# Altium PCB mergedPCBs.PcbDoc (part 2 of 4)
Units mil, origin at the board's own origin, x right, y up, seen from the top; angles counter-clockwise.
Board outline 7880 x 8510 mil, 2 copper layers (Top Layer, Bottom Layer); 381 components, 0 nets, 1142 pads, 205 vias.
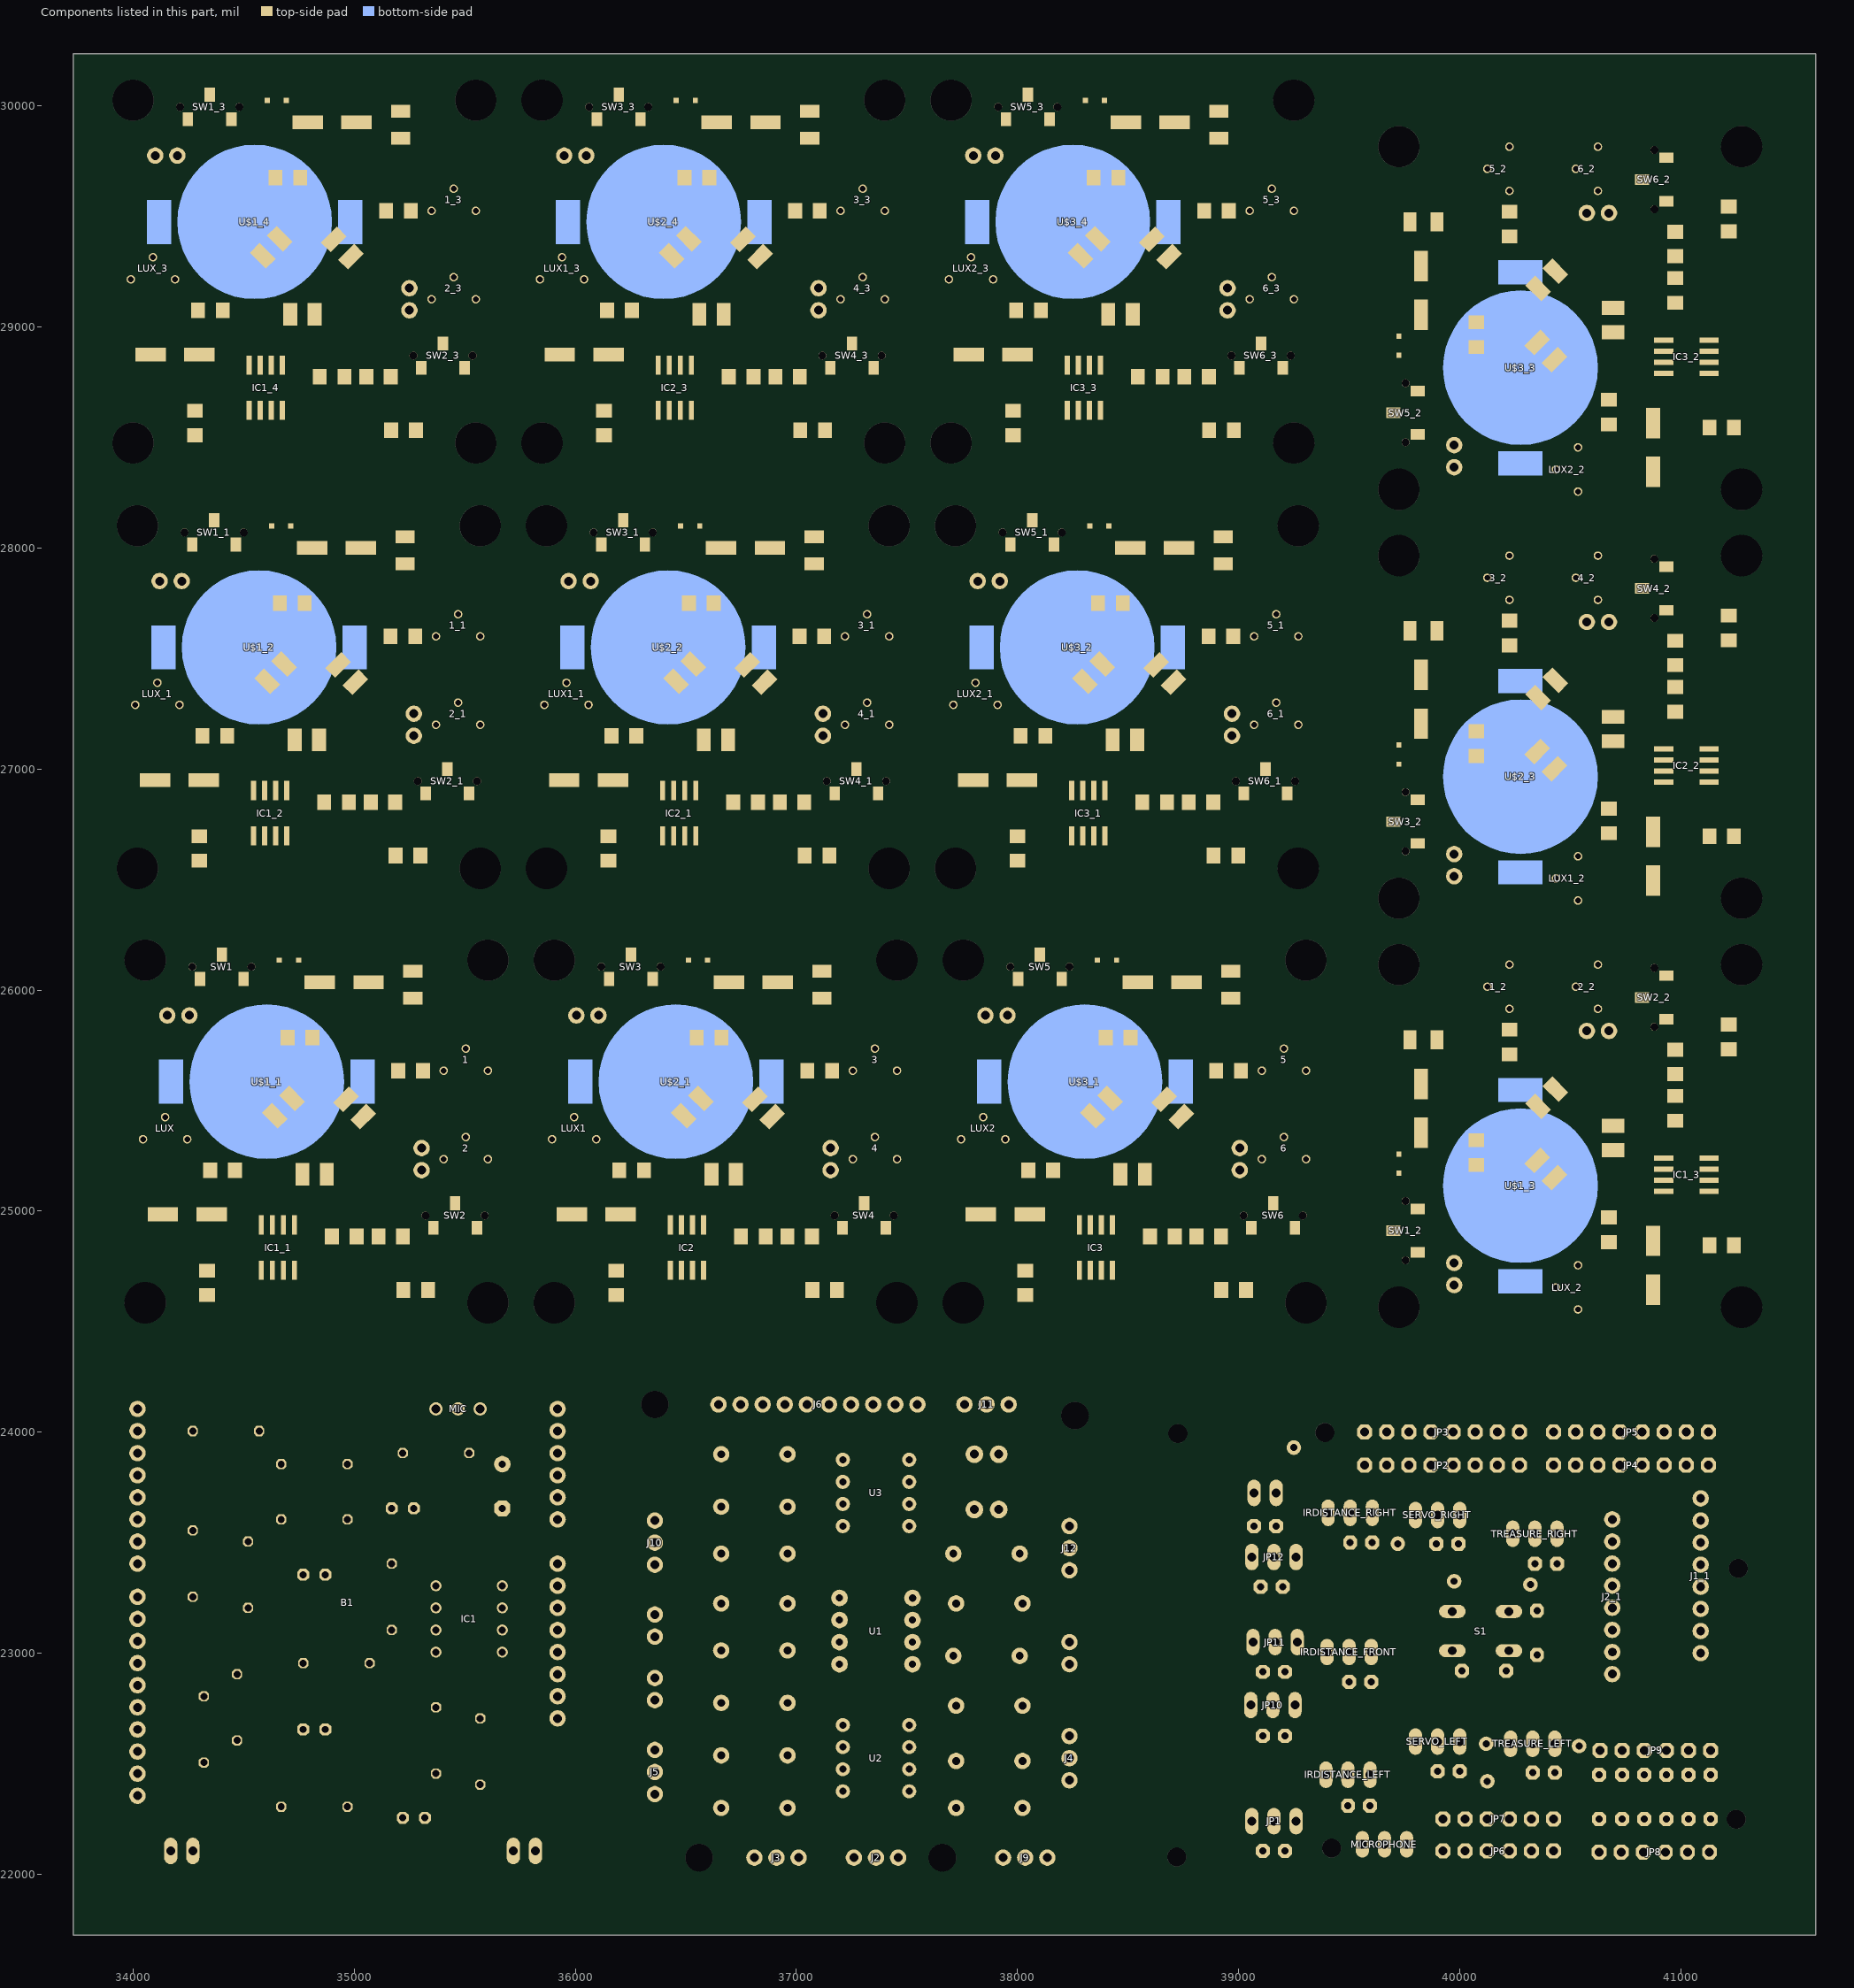
[diagram p2: the components of this part, seen from the top]

## Via types
v1: diameter 41.59/41.59 (per signal layer), hole 25.59, Top Layer to Bottom Layer, 168 vias
v2: diameter 34/34 (per signal layer), hole 20, Top Layer to Bottom Layer, 25 vias
v3: diameter 53.15/66 (per signal layer), hole 35.43, Top Layer to Bottom Layer, 12 vias

## Nets (pads, with @x,y where several pads share a name; then routed paths per layer and width w, separated by ;. In a path a pad name is that pad's centre, name@x,y a point inside that pad or via, vN(x,y) a via of type N, cw(c..) or ccw(c..) an arc to the next point about the centre after c; other vN are vias at no path point) (continued)
copper on no net: | length 406403
  Top Layer w6: 34294.02,29075 34300.24,29068.78 ; 34314.02,27150 34320.24,27143.78 ; 34349.02,25185 34355.24,25178.78 ; 34450,28968.86 34481.57,28968.86 34487.72,28975 ; 34470,27043.86 34501.57,27043.86 34507.72,27050 ; 34505,25078.86 34536.57,25078.86 34542.72,25085 ; 36144.02,29075 36150.24,29068.78 ; 36164.02,27150 36170.24,27143.78 ; 36199.02,25185 36205.24,25178.78 ; 36300,28968.86 36331.57,28968.86 36337.72,28975 ; 36320,27043.86 36351.57,27043.86 36357.72,27050 ; 36355,25078.86 36386.57,25078.86 36392.72,25085 ; 37994.02,29075 38000.24,29068.78 ; 38014.02,27150 38020.24,27143.78 ; 38049.02,25185 38055.24,25178.78 ; 38150,28968.86 38181.57,28968.86 38187.72,28975 ; 38170,27043.86 38201.57,27043.86 38207.72,27050 ; 38205,25078.86 38236.57,25078.86 38242.72,25085 ; 40675,24859.02 40681.22,24865.24 ; 40675,26709.02 40681.22,26715.24 ; 40675,28559.02 40681.22,28565.24 ; 40775,25052.72 40781.14,25046.57 40781.14,25015 ; 40775,26902.72 40781.14,26896.57 40781.14,26865 ; 40775,28752.72 40781.14,28746.57 40781.14,28715
  Top Layer w10: 35920,22705 36320,22705 ; 36125,21815 36125,22660 ; 36130,22755 36130,24365 ; 38325,23213 38425,23313 38425,23473.15 v3(38690.27,23738.42) ; 38500,23665 38500,24390 ; 38535,21770 38535,23510
  Top Layer w12: 40729.87,22100.22 40734.87,22105.22 ; 40829.87,22100.22 40834.87,22105.22 ; 40929.87,22100.22 40934.87,22105.22 40934.87,22110.22 ; 41029.87,22100.22 41034.87,22105.22 41034.87,22115.22 ; 41129.87,22100.22 41134.87,22105.22 41134.87,22115.22
  Top Layer w16: 34079.76,28875 34079.76,28895.24 ; 34099.76,26950 34099.76,26970.24 ; 34134.76,24985 34134.76,25005.24 ; 34300.24,28875 34300,28875 34350,28875 ; 34320.24,26950 34320,26950 34370,26950 ; 34355.24,24985 34355,24985 34405,24985 ; 34600,30025 34606.69,30025 ; 34606.69,30022.31 34606.69,30025 ; 34606.69,30031.69 34606.69,30025 ; 34620,28100 34626.69,28100 ; 34625,28827.36 34625.19,28846.55 34625.19,28828.47 ; 34626.69,28097.31 34626.69,28100 ; 34626.69,28106.69 34626.69,28100 ; 34644.02,29675 34650,29669.02 ; 34645,26902.36 34645.19,26921.55 34645.19,26903.47 ; 34655,26135 34661.69,26135 ; 34661.69,26132.31 34661.69,26135 ; 34661.69,26141.69 34661.69,26135 ; 34664.02,27750 34670,27744.02 ; 34680,24937.36 34680.19,24956.55 34680.19,24938.47 ; 34699.02,25785 34705,25779.02 ; v1(34736.2,28830) v1@34740.84,28827.36 ; 34750,29925 34789.76,29925 ; 34755.98,29675 34932.85,29675 34950,29657.85 ; v1(34756.2,26905) v1@34760.84,26902.36 ; 34770,28000 34809.76,28000 ; 34775.98,27750 34952.85,27750 34970,27732.85 ; v1(34791.2,24940) v1@34795.84,24937.36 ; 34805,26035 34844.76,26035 ; 34810.98,25785 34987.85,25785 35005,25767.85 ; 34844.02,28775 34850,28769.02 ; 34864.02,26850 34870,26844.02 ; 34899.02,24885 34905,24879.02 ; 34950,28780.98 34955.98,28775 ; 34970,26855.98 34975.98,26850 ; 34984.21,28897 34986,28897 ; 35000,29935.24 35010.24,29925 ; 35004.21,26972 35006,26972 ; 35005,24890.98 35010.98,24885 ; 35020,28010.24 35030.24,28000 ; 35039.21,25007 35041,25007 ; 35050,28770.12 35054.88,28775 ; 35055,26045.24 35065.24,26035 ; 35070,26845.12 35074.88,26850 ; 35105,24880.12 35109.88,24885 ; 35177.95,29852.95 35210.24,29852.95 ; 35197.95,27927.95 35230.24,27927.95 ; 35210.24,29975 35250,29975 ; 35230.24,28050 35270,28050 ; 35232.95,25962.95 35265.24,25962.95 ; 35265.24,26085 35305,26085 ; 35278.98,28533 35286.98,28525 35300,28525 ; 35298.98,26608 35306.98,26600 35320,26600 ; 35303.15,28814.76 35303.15,28828.15 ; 35323.15,26889.76 35323.15,26903.15 ; 35333.98,24643 35341.98,24635 35355,24635 ; 35358.15,24924.76 35358.15,24938.15 ; 35358.5,28583.5 35358.5,28583.61 ; 35378.5,26658.5 35378.5,26658.61 ; 35401.57,28776.57 35401.57,28796.75 ; 35413.5,24693.5 35413.5,24693.61 ; 35421.57,26851.57 35421.57,26871.75 ; 35456.57,24886.57 35456.57,24906.75 ; 35500,28814.76 35500,28825 ; 35520,26889.76 35520,26900 ; 35555,24924.76 35555,24935 ; 35600,28841.51 35601.15,28842.66 ; 35600,28898.25 35601.15,28897.1 ; 35620,26916.51 35621.15,26917.66 ; 35620,26973.25 35621.15,26972.1 ; 35655,24951.51 35656.15,24952.66 ; 35655,25008.25 35656.15,25007.1 ; 35929.76,28875 35929.76,28895.24 ; 35949.76,26950 35949.76,26970.24 ; 35984.76,24985 35984.76,25005.24 ; 36150.24,28875 36150,28875 36200,28875 ; 36170.24,26950 36170,26950 36220,26950 ; 36205.24,24985 36205,24985 36255,24985 ; 36450,30025 36456.69,30025 ; 36456.69,30022.31 36456.69,30025 ; 36456.69,30031.69 36456.69,30025 ; 36470,28100 36476.69,28100 ; 36475,28827.36 36475.19,28846.55 36475.19,28828.47 ; 36476.69,28097.31 36476.69,28100 ; 36476.69,28106.69 36476.69,28100 ; 36494.02,29675 36500,29669.02 ; 36495,26902.36 36495.19,26921.55 36495.19,26903.47 ; 36505,26135 36511.69,26135 ; 36511.69,26132.31 36511.69,26135 ; 36511.69,26141.69 36511.69,26135 ; 36514.02,27750 36520,27744.02 ; 36530,24937.36 36530.19,24956.55 36530.19,24938.47 ; 36549.02,25785 36555,25779.02 ; v1(36586.2,28830) v1@36590.84,28827.36 ; 36600,29925 36639.76,29925 ; 36605.98,29675 36782.85,29675 36800,29657.85 ; v1(36606.2,26905) v1@36610.84,26902.36 ; 36620,28000 36659.76,28000 ; 36625.98,27750 36802.85,27750 36820,27732.85 ; v1(36641.2,24940) v1@36645.84,24937.36 ; 36655,26035 36694.76,26035 ; 36660.98,25785 36837.85,25785 36855,25767.85 ; 36694.02,28775 36700,28769.02 ; 36714.02,26850 36720,26844.02 ; 36749.02,24885 36755,24879.02 ; 36800,28780.98 36805.98,28775 ; 36820,26855.98 36825.98,26850 ; 36834.21,28897 36836,28897 ; 36850,29935.24 36860.24,29925 ; 36854.21,26972 36856,26972 ; 36855,24890.98 36860.98,24885 ; 36870,28010.24 36880.24,28000 ; 36889.21,25007 36891,25007 ; 36900,28770.12 36904.88,28775 ; 36905,26045.24 36915.24,26035 ; 36920,26845.12 36924.88,26850 ; 36955,24880.12 36959.88,24885 ; 37027.95,29852.95 37060.24,29852.95 ; 37047.95,27927.95 37080.24,27927.95 ; 37060.24,29975 37100,29975 ; 37080.24,28050 37120,28050 ; 37082.95,25962.95 37115.24,25962.95 ; 37115.24,26085 37155,26085 ; 37128.98,28533 37136.98,28525 37150,28525 ; 37148.98,26608 37156.98,26600 37170,26600 ; 37153.15,28814.76 37153.15,28828.15 ; 37173.15,26889.76 37173.15,26903.15 ; 37183.98,24643 37191.98,24635 37205,24635 ; 37208.15,24924.76 37208.15,24938.15 ; 37208.5,28583.5 37208.5,28583.61 ; 37228.5,26658.5 37228.5,26658.61 ; 37251.57,28776.57 37251.57,28796.75 ; 37263.5,24693.5 37263.5,24693.61 ; 37271.57,26851.57 37271.57,26871.75 ; 37306.57,24886.57 37306.57,24906.75 ; 37350,28814.76 37350,28825 ; 37370,26889.76 37370,26900 ; 37405,24924.76 37405,24935 ; 37450,28841.51 37451.15,28842.66 ; 37450,28898.25 37451.15,28897.1 ; 37470,26916.51 37471.15,26917.66 ; 37470,26973.25 37471.15,26972.1 ; 37505,24951.51 37506.15,24952.66 ; 37505,25008.25 37506.15,25007.1 ; 37779.76,28875 37779.76,28895.24 ; 37799.76,26950 37799.76,26970.24 ; 37834.76,24985 37834.76,25005.24 ; 38000.24,28875 38000,28875 38050,28875 ; 38020.24,26950 38020,26950 38070,26950 ; 38055.24,24985 38055,24985 38105,24985 ; 38300,30025 38306.69,30025 ; 38306.69,30022.31 38306.69,30025 ; 38306.69,30031.69 38306.69,30025 ; 38320,28100 38326.69,28100 ; 38325,28827.36 38325.19,28846.55 38325.19,28828.47 ; 38326.69,28097.31 38326.69,28100 ; 38326.69,28106.69 38326.69,28100 ; 38344.02,29675 38350,29669.02 ; 38345,26902.36 38345.19,26921.55 38345.19,26903.47 ; 38355,26135 38361.69,26135 ; 38361.69,26132.31 38361.69,26135 ; 38361.69,26141.69 38361.69,26135 ; 38364.02,27750 38370,27744.02 ; 38380,24937.36 38380.19,24956.55 38380.19,24938.47 ; 38399.02,25785 38405,25779.02 ; v1(38436.2,28830) v1@38440.84,28827.36 ; 38450,29925 38489.76,29925 ; 38455.98,29675 38632.85,29675 38650,29657.85 ; v1(38456.2,26905) v1@38460.84,26902.36 ; 38470,28000 38509.76,28000 ; 38475.98,27750 38652.85,27750 38670,27732.85 ; v1(38491.2,24940) v1@38495.84,24937.36 ; 38505,26035 38544.76,26035 ; 38510.98,25785 38687.85,25785 38705,25767.85 ; 38544.02,28775 38550,28769.02 ; 38564.02,26850 38570,26844.02 ; 38599.02,24885 38605,24879.02 ; 38650,28780.98 38655.98,28775 ; 38670,26855.98 38675.98,26850 ; 38684.21,28897 38686,28897 ; 38700,29935.24 38710.24,29925 ; 38704.21,26972 38706,26972 ; 38705,24890.98 38710.98,24885 ; 38720,28010.24 38730.24,28000 ; 38739.21,25007 38741,25007 ; 38750,28770.12 38754.88,28775 ; 38755,26045.24 38765.24,26035 ; 38770,26845.12 38774.88,26850 ; 38805,24880.12 38809.88,24885 ; 38877.95,29852.95 38910.24,29852.95 ; 38897.95,27927.95 38930.24,27927.95 ; 38910.24,29975 38950,29975 ; 38930.24,28050 38970,28050 ; 38932.95,25962.95 38965.24,25962.95 ; 38965.24,26085 39005,26085 ; 38978.98,28533 38986.98,28525 39000,28525 ; 38998.98,26608 39006.98,26600 39020,26600 ; 39003.15,28814.76 39003.15,28828.15 ; 39023.15,26889.76 39023.15,26903.15 ; 39033.98,24643 39041.98,24635 39055,24635 ; 39058.15,24924.76 39058.15,24938.15 ; 39058.5,28583.5 39058.5,28583.61 ; 39078.5,26658.5 39078.5,26658.61 ; 39101.57,28776.57 39101.57,28796.75 ; 39113.5,24693.5 39113.5,24693.61 ; 39121.57,26851.57 39121.57,26871.75 ; 39156.57,24886.57 39156.57,24906.75 ; 39200,28814.76 39200,28825 ; 39220,26889.76 39220,26900 ; 39255,24924.76 39255,24935 ; 39300,28841.51 39301.15,28842.66 ; 39300,28898.25 39301.15,28897.1 ; 39320,26916.51 39321.15,26917.66 ; 39320,26973.25 39321.15,26972.1 ; 39355,24951.51 39356.15,24952.66 ; 39355,25008.25 39356.15,25007.1 ; 39718.31,25171.69 39725,25171.69 ; 39718.31,27021.69 39725,27021.69 ; 39718.31,28871.69 39725,28871.69 ; 39725,25165 39725,25171.69 ; 39725,27015 39725,27021.69 ; 39725,28865 39725,28871.69 ; 39727.69,25171.69 39725,25171.69 ; 39727.69,27021.69 39725,27021.69 ; 39727.69,28871.69 39725,28871.69 ; 39775,25775.24 39775,25815 ; 39775,27625.24 39775,27665 ; 39775,29475.24 39775,29515 ; 39814.76,25565 39825,25575.24 ; 39814.76,27415 39825,27425.24 ; 39814.76,29265 39825,29275.24 ; 39825,25315 39825,25354.76 ; 39825,27165 39825,27204.76 ; 39825,29015 39825,29054.76 ; 39897.05,25742.95 39897.05,25775.24 ; 39897.05,27592.95 39897.05,27625.24 ; 39897.05,29442.95 39897.05,29475.24 ; 40075,25209.02 40080.98,25215 ; 40075,25320.98 40075,25497.85 40092.15,25515 ; 40075,27059.02 40080.98,27065 ; 40075,27170.98 40075,27347.85 40092.15,27365 ; 40075,28909.02 40080.98,28915 ; 40075,29020.98 40075,29197.85 40092.15,29215 ; 40851.75,26165 40852.9,26166.15 ; 40851.75,28015 40852.9,28016.15 ; 40851.75,29865 40852.9,29866.15 ; 40853,25549.21 40853,25551 ; 40853,27399.21 40853,27401 ; 40853,29249.21 40853,29251 ; 40854.76,24644.76 40875,24644.76 ; 40854.76,26494.76 40875,26494.76 ; 40854.76,28344.76 40875,28344.76 ; 40875,24865.24 40875,24865 40875,24915 ; 40875,26715.24 40875,26715 40875,26765 ; 40875,28565.24 40875,28565 40875,28615 ; 40907.34,26166.15 40908.49,26165 ; 40907.34,28016.15 40908.49,28015 ; 40907.34,29866.15 40908.49,29865 ; v1(40920,25301.2) v1@40922.64,25305.84 ; v1(40920,27151.2) v1@40922.64,27155.84 ; v1(40920,29001.2) v1@40922.64,29005.84 ; 40921.53,25190.19 40903.45,25190.19 40922.64,25190 ; 40921.53,27040.19 40903.45,27040.19 40922.64,27040 ; 40921.53,28890.19 40903.45,28890.19 40922.64,28890 ; 40921.85,25868.15 40935.24,25868.15 ; 40921.85,27718.15 40935.24,27718.15 ; 40921.85,29568.15 40935.24,29568.15 ; 40925,26065 40935.24,26065 ; 40925,27915 40935.24,27915 ; 40925,29765 40935.24,29765 ; 40953.25,25966.57 40973.43,25966.57 ; 40953.25,27816.57 40973.43,27816.57 ; 40953.25,29666.57 40973.43,29666.57 ; 40969.02,25515 40975,25520.98 ; 40969.02,27365 40975,27370.98 ; 40969.02,29215 40975,29220.98 ; 40975,25409.02 40980.98,25415 ; 40975,25619.88 40979.88,25615 ; 40975,27259.02 40980.98,27265 ; 40975,27469.88 40979.88,27465 ; 40975,29109.02 40980.98,29115 ; 40975,29319.88 40979.88,29315 ; 41166.39,25923.5 41166.5,25923.5 ; 41166.39,27773.5 41166.5,27773.5 ; 41166.39,29623.5 41166.5,29623.5 ; 41217,25843.98 41225,25851.98 41225,25865 ; 41217,27693.98 41225,27701.98 41225,27715 ; 41217,29543.98 41225,29551.98 41225,29565 ; 34400,29215 34401,29213 34400,29215 ; 34420,27290 34421,27288 34420,27290 ; 34455,25325 34456,25323 34455,25325 ; 34950,28824.03 34950,28825 34950,28824.03 ; 34970,26899.03 34970,26900 34970,26899.03 ; 35005,24934.03 35005,24935 35005,24934.03 ; 36250,29215 36251,29213 36250,29215 ; 36270,27290 36271,27288 36270,27290 ; 36305,25325 36306,25323 36305,25325 ; 36800,28824.03 36800,28825 36800,28824.03 ; 36820,26899.03 36820,26900 36820,26899.03 ; 36855,24934.03 36855,24935 36855,24934.03 ; 38100,29215 38101,29213 38100,29215 ; 38120,27290 38121,27288 38120,27290 ; 38155,25325 38156,25323 38155,25325 ; 38650,28824.03 38650,28825 38650,28824.03 ; 38670,26899.03 38670,26900 38670,26899.03 ; 38705,24934.03 38705,24935 38705,24934.03 ; 40535,24965 40537,24966 40535,24965 ; 40535,26815 40537,26816 40535,26815 ; 40535,28665 40537,28666 40535,28665 ; 40925,25515 40925.97,25515 40925,25515 ; 40925,27365 40925.97,27365 40925,27365 ; 40925,29215 40925.97,29215 40925,29215